# Altium PCB HANC_Digital.PcbDoc
Units mil, origin at the board's own origin, x right, y up, seen from the top; angles counter-clockwise.
Board outline 3140 x 2015 mil, 2 copper layers (Top Layer, Bottom Layer); 56 components, 112 nets, 257 pads, 57 vias.
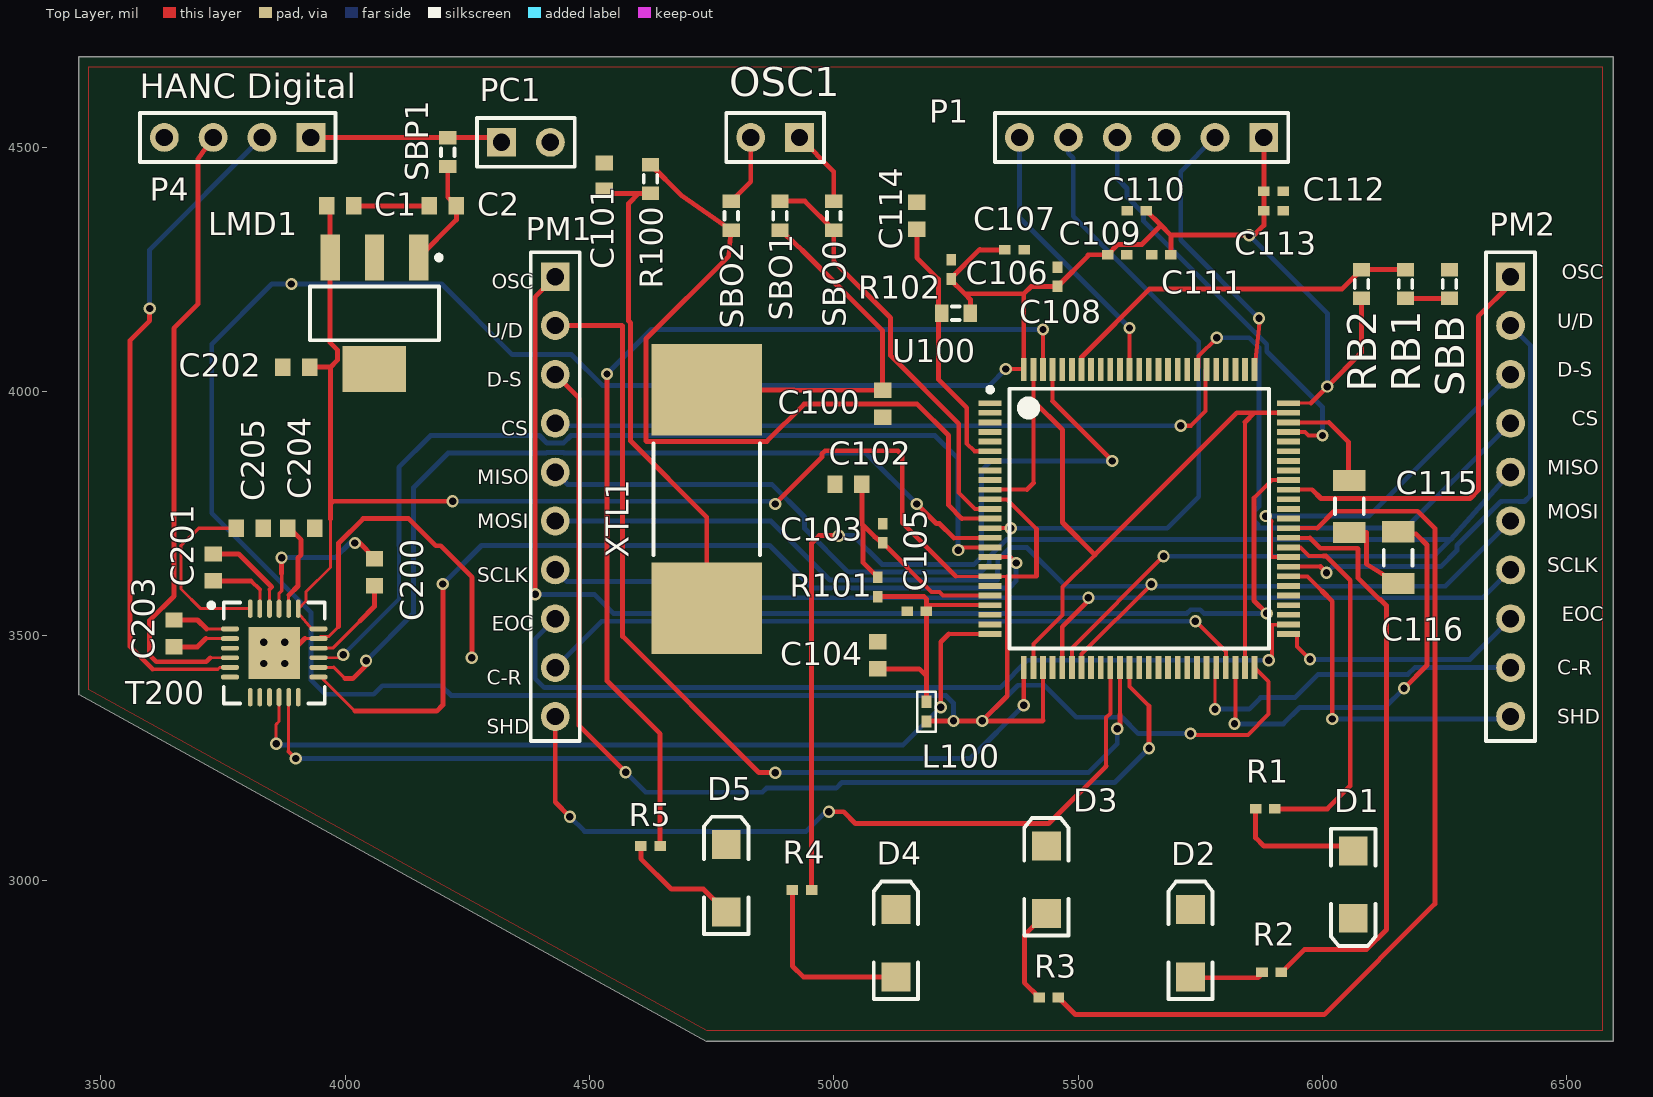
[diagram p0: Top Layer view]
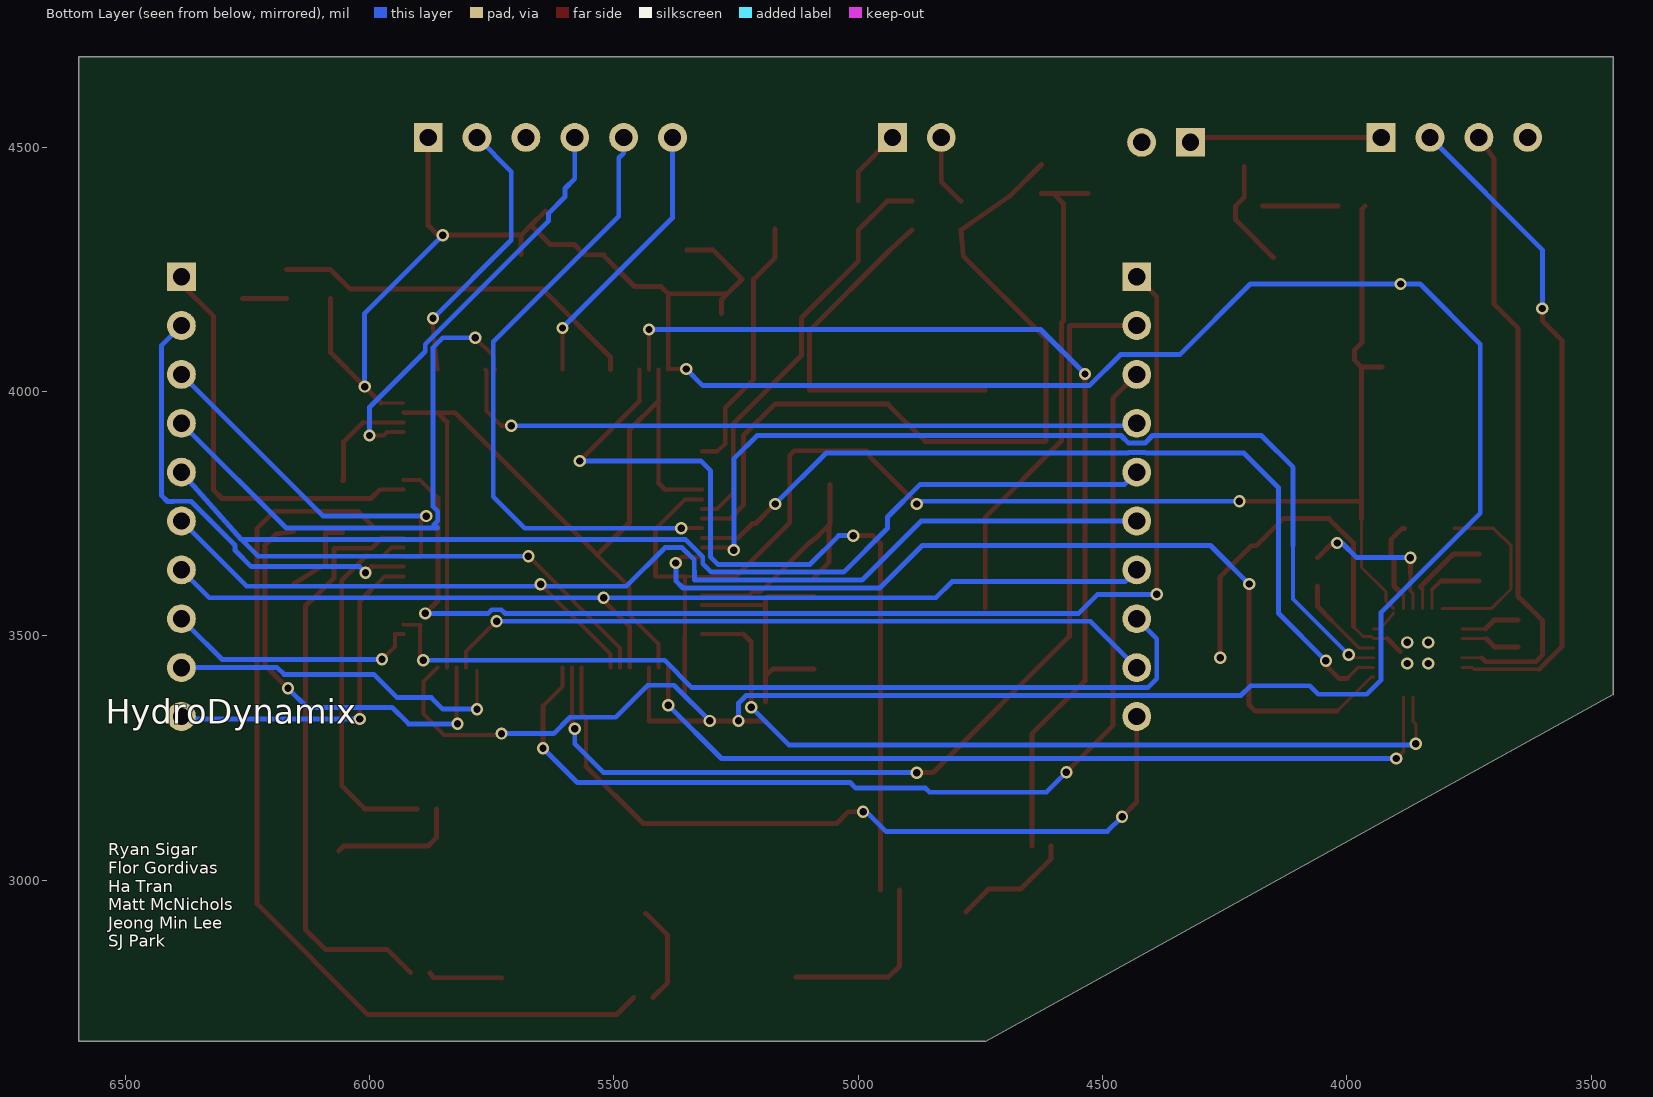
[diagram p1: Bottom Layer view, seen from below]

## Layer stack, top to bottom
Top Solder: solder mask 0.4, Solder Resist, Dk 3.5
Top Layer: signal copper 1.4
Dielectric 1: dielectric 12.6, FR-4, Dk 4.8
Bottom Layer: signal copper 1.4
Bottom Solder: solder mask 0.4, Solder Resist, Dk 3.5

## Board outline
6595,4685 6595,2670 4740,2670 3455,3380 3455,4685

## Design rules (kind name [scope] priority, off if disabled: settings)
Clearance [All] p1: gap=6
PolygonConnect [All] p1: connectstyle=Relief reliefconductorwidth=10 reliefentries=4 polygonreliefangle="90 Angle" airgapwidth=10
RoutingVias [All] p1: holewidth=15 width=25 viastyle="Through Hole" minholewidth=15 minwidth=25 maxholewidth=15 maxwidth=25
SMDNeckDown [All] p1: percent=70.000
SolderMaskExpansion [All] p1: expansion=4
Width [All] p1: maxlimit=10 minlimit=6 preferedwidth=10
30 further rules are at their usual default settings.

## Classes and differential pairs
component class HANC_Digital_TS: C1 C2 D1 D2 D3 D4 D5 LMD1 OSC1 P1 P4 PC1 PM1 PM2 R1 R2 R3 R4 R5 SBP1
component class U1: C100 C101 C102 C103 C104 C105 C106 C107 C108 C109 C110 C111 C112 C113 C114 C115 C116 L100 R100 R101 R102 RB1 RB2 SBB SBO0 SBO1 SBO2 U100 XTL1
component class U_RS-232: C200 C201 C202 C203 C204 C205 T200

## Components (designator, comment, footprint, x,y, rotation, side; value= is the part's Value field where it differs from the comment)
C1 "Cap" 1608[0603] 3990,4380 r180 top
C2 "Cap Semi" 1608[0603] 4200,4380 r0 top
C100 "Cap Semi" 1608[0603] 5100,3975 r270 top
C101 "Cap Semi" 1608[0603] 4530,4440 r90 top
C102 "Cap Pol3" 1608[0603] 5030,3810 r180 top
C103 "Cap Semi" 0402 5100,3710 r270 top
C104 "Cap Pol3" 1608[0603] 5090,3460 r90 top
C105 "Cap Semi" 0402 5170,3550 r180 top
C106 "Cap Semi" 0402 5240,4250 r270 top
C107 "Cap Semi" 0402 5370,4290 r180 top
C108 "Cap Semi" 0402 5457.76,4234.68 r270 top
C109 "Cap Semi" 0402 5580,4280 r180 top
C110 "Cap Semi" 0402 5620,4370 r0 top
C111 "Cap Semi" 0402 5670,4280 r0 top
C112 "Cap Semi" 0402 5900,4410 r180 top
C113 "Cap Semi" 0402 5900,4370 r180 top
C114 "Cap Semi" 1608[0603] 5170,4360 r270 top
C115 "Cap Semi" C1206 6055,3765 r90 top
C116 "Cap Semi" C1206 6155,3660 r90 top
C200 "Cap Semi" 1608[0603] 4060,3630 r270 top
C201 "Cap Semi" 1608[0603] 3730,3640 r270 top
C202 "Cap Semi" 1608[0603] 3900,4050 r180 top
C203 "Cap Semi" 1608[0603] 3650,3505 r270 top
C204 "Cap Semi" 1608[0603] 3910,3720 r0 top
C205 "Cap Semi" 1608[0603] 3805,3720 r0 top
D1 "LED2" 3.2X1.6X1.1 6063,2991 r270 top
D2 "LED2" 3.2X1.6X1.1 5730,2871.1 r90 top
D3 "LED2" 3.2X1.6X1.1 5435,3001.1 r90 top
D4 "LED2" 3.2X1.6X1.1 5127.17,2871.1 r90 top
D5 "LED2" 3.2X1.6X1.1 4780,3003.9 r90 top
L100 "Inductor" 0402C-GENERIC 5190,3325 r90 top
LMD1 "LM3940" SOT223_N 4060,4160 r270 top
OSC1 "Header 2" HDR1X2 4930,4520 r180 top
P1 "SWD" HDR1X6 5880,4520 r180 top
P4 "4AUX" HDR1X4 3930,4520 r180 top
PC1 "Header 2" HDR1X2 4320,4510 r0 top
PM1 "Header 10" HDR1X10 4430,4235 r270 top
PM2 "Header 10" HDR1X10 6385,4235 r270 top
R1 "Res3" 0402 5883,3146 r0 top
R2 "Res3" 0402 5896,2812 r0 top
R3 "Res3" 0402 5440,2760 r0 top
R4 "Res3" 0402 4935,2980 r0 top
R5 "Res3" 0402 4625,3070 r0 top
R100 "Res3" J1-0603 4625,4435 r90 top
R101 "Res3" 0402 5090,3600 r90 top
R102 "Res3" J1-0603 5250,4160 r0 top
RB1 "Res3" J1-0603 6170,4220 r270 top
RB2 "Res3" J1-0603 6080,4220 r90 top
SBB "Res3" J1-0603 6260,4220 r270 top
SBO0 "Res3" J1-0603 5000,4360 r90 top (schematic designator SB100)
SBO1 "Res3" J1-0603 4890,4360 r90 top (schematic designator SB101)
SBO2 "Res3" J1-0603 4790,4360 r90 top (schematic designator SB102)
SBP1 "Res3" J1-0603 4210,4490 r270 top (schematic designator SB_LMD1)
T200 "TRS3122" QFN50P485X485X100_HS-25N 3855,3465 r0 top
U100 "STM32F413VGT6" STM-LQFP100_V 5625,3740 r0 top
XTL1 "MA-505" CAPC15256X06N 4740,3780 r90 top

## Footprints (in the part's own frame and the unit in brackets; to place one, negate y for a bottom-side part, rotate by r counter-clockwise, add the part's x,y. Pads: shape width x height; smd on the part's side, far side on the other; paste and mask are expansions set on the pad)
3.2X1.6X1.1 [mm] "SMT LED; 2 Flat Leads"
  rect 1.5x1.5 smd: 1(-1.75,0) 2(1.75,0)
  silkscreen extent -2.9,-1.15 3.2,1.15
0402 [mm] "Chip Capacitor, Body 1.0x0.5mm, IPC High Density"
  rect 0.6x0.5 smd: 1(-0.5,0) 2(0.5,0)
  body extent -0.55,-0.3 0.55,0.3, height 1.3
0402C-GENERIC [mil]
  rect 25x20 smd: 1(0,0) 2(40,0)
  silkscreen extent -21,-19 61,19
1608[0603] [mm] "Chip Capacitor, Body 1.6x0.8mm, IPC High Density"
  rect 0.8x0.9 smd: 1(-0.7,0) 2(0.7,0)
  body extent -0.87,-0.48 0.87,0.48, height 1.3
C1206 [mm] "Chip Capacitor, Body 3.2x1.6mm, IPC High Density"
  rect 1.1x1.7 smd: 1(-1.35,0) 2(1.35,0)
  silkscreen extent -0.4,-0.75 0.4,0.75, body extent -1.7,-0.9 1.7,0.9, height 1.3
CAPC15256X06N [mm] "Chip Capacitor, 2-Leads, Body 15.20x5.60mm, IPC Medium Density"
  rect 4.75x5.75 smd: 1(-5.675,0) 2(5.675,0)
  silkscreen extent -2.9,-2.78 2.9,2.78, body extent -7.7,-2.85 7.7,2.85, height 0.6
HDR1X2 [mm] "Connector; Header; 2 Position"
  rect 1.5x1.5 hole 0.9: 1(0,0)
  round 1.5 hole 0.9: 2(2.54,0)
  silkscreen extent -1.27,-1.27 3.81,1.27
HDR1X4 [mm] "Connector; Header; 4 Position"
  rect 1.5x1.5 hole 0.9: 1(0,0)
  round 1.5 hole 0.9: 2(2.54,0) 3(5.08,0) 4(7.62,0)
  silkscreen extent -1.27,-1.27 8.89,1.27
HDR1X6 [mm] "Connector; Header; 6 Position"
  rect 1.5x1.5 hole 0.9: 1(0,0)
  round 1.5 hole 0.9: 2(2.54,0) 3(5.08,0) 4(7.62,0) 5(10.16,0) 6(12.7,0)
  silkscreen extent -1.27,-1.27 13.97,1.27
HDR1X10 [mm] "Connector; Header; 10 Position"
  rect 1.5x1.5 hole 0.9: 1(0,0)
  round 1.5 hole 0.9: 2(2.54,0) 3(5.08,0) 4(7.62,0) 5(10.16,0) 6(12.7,0) 7(15.24,0) 8(17.78,0) 9(20.32,0) 10(22.86,0)
  silkscreen extent -1.27,-1.27 24.13,1.27
J1-0603 [mm] "Chip Resistor, Body 1.6x0.8mm, IPC High Density"
  rect 0.7x0.9 smd: 1(-0.75,0) 2(0.75,0)
  silkscreen extent -0.2,-0.35 0.2,0.35, body extent -0.85,-0.48 0.85,0.48, height 0.9
QFN50P485X485X100_HS-25N [mm] "QFN, 24-Leads, Body 4.85x4.85mm, Pitch 0.50mm, Thermal Pad 2.70x2.70mm, IPC Medium Density"
  oval 0.95x0.25 smd: 1(-2.3,1.25) 2(-2.3,0.75) 3(-2.3,0.25) 4(-2.3,-0.25) 5(-2.3,-0.75) 6(-2.3,-1.25) 13(2.3,-1.25) 14(2.3,-0.75) 15(2.3,-0.25) 16(2.3,0.25) 17(2.3,0.75) 18(2.3,1.25)
  oval 0.25x0.95 smd: 7(-1.25,-2.3) 8(-0.75,-2.3) 9(-0.25,-2.3) 10(0.25,-2.3) 11(0.75,-2.3) 12(1.25,-2.3) 19(1.25,2.3) 20(0.75,2.3) 21(0.25,2.3) 22(-0.25,2.3) 23(-0.75,2.3) 24(-1.25,2.3)
  rect 2.7x2.7 smd: 25(0,0)
  silkscreen extent -3.4,-2.62 2.62,2.62, body extent -2.48,-2.47 2.47,2.48, height 1
SOT223_N [mm] "SOT223, 4-Leads, Body 6.5x3.5mm, Pitch 2.3mm, Lead Span 7mm, IPC Medium Density"
  rect 2.4x1 smd: 1(-2.9,2.3) 2(-2.9,0) 3(-2.9,-2.3)
  rect 2.4x3.3 smd: 4(2.9,0)
  silkscreen extent -3.02,-3.35 1.4,3.48, body extent -1.85,-3.35 1.85,3.35, height 1.7
STM-LQFP100_V [mm] "Thin QFP, 100-Leads, Body 14x14mm, Pitch 0.5mm, ST Recommended"
  rect 1.2x0.3 smd: 1(-7.75,6) 2(-7.75,5.5) 3(-7.75,5) 4(-7.75,4.5) 5(-7.75,4) 6(-7.75,3.5) 7(-7.75,3) 8(-7.75,2.5) 9(-7.75,2) 10(-7.75,1.5) 11(-7.75,1) 12(-7.75,0.5) 13(-7.75,0) 14(-7.75,-0.5) 15(-7.75,-1) 16(-7.75,-1.5) 17(-7.75,-2) 18(-7.75,-2.5) 19(-7.75,-3) 20(-7.75,-3.5) 21(-7.75,-4) 22(-7.75,-4.5) 23(-7.75,-5) 24(-7.75,-5.5) 25(-7.75,-6) 51(7.75,-6) 52(7.75,-5.5) 53(7.75,-5) 54(7.75,-4.5) 55(7.75,-4) 56(7.75,-3.5) 57(7.75,-3) 58(7.75,-2.5) 59(7.75,-2) 60(7.75,-1.5) 61(7.75,-1) 62(7.75,-0.5) 63(7.75,0) 64(7.75,0.5) 65(7.75,1) 66(7.75,1.5) 67(7.75,2) 68(7.75,2.5) 69(7.75,3) 70(7.75,3.5) 71(7.75,4) 72(7.75,4.5) 73(7.75,5) 74(7.75,5.5) 75(7.75,6)
  rect 0.3x1.2 smd: 26(-6,-7.75) 27(-5.5,-7.75) 28(-5,-7.75) 29(-4.5,-7.75) 30(-4,-7.75) 31(-3.5,-7.75) 32(-3,-7.75) 33(-2.5,-7.75) 34(-2,-7.75) 35(-1.5,-7.75) 36(-1,-7.75) 37(-0.5,-7.75) 38(0,-7.75) 39(0.5,-7.75) 40(1,-7.75) 41(1.5,-7.75) 42(2,-7.75) 43(2.5,-7.75) 44(3,-7.75) 45(3.5,-7.75) 46(4,-7.75) 47(4.5,-7.75) 48(5,-7.75) 49(5.5,-7.75) 50(6,-7.75) 76(6,7.75) 77(5.5,7.75) 78(5,7.75) 79(4.5,7.75) 80(4,7.75) 81(3.5,7.75) 82(3,7.75) 83(2.5,7.75) 84(2,7.75) 85(1.5,7.75) 86(1,7.75) 87(0.5,7.75) 88(0,7.75) 89(-0.5,7.75) 90(-1,7.75) 91(-1.5,7.75) 92(-2,7.75) 93(-2.5,7.75) 94(-3,7.75) 95(-3.5,7.75) 96(-4,7.75) 97(-4.5,7.75) 98(-5,7.75) 99(-5.5,7.75) 100(-6,7.75)
  silkscreen extent -7.87,-6.75 6.75,6.82, body extent -8,-8 8,8, height 1.6

## Part data
C1: library part "Cap Semi", "Capacitor (Semiconductor SIM Model)"
C2 C100 C101 C106 C107 C108 C109 C110 C111 C112 C113 C114 C115 C116 C200 C201 C202 C203 C204 C205: "Capacitor (Semiconductor SIM Model)"
C102 C104: "TACL105K016XTA"
C103 C105: "C1005X5R1E103K050BA"
D1 D2 D3 D4 D5: "Typical RED, GREEN, YELLOW, AMBER GaAs LED"
LMD1 T200: library part Component_1
OSC1 PC1: "Header, 2-Pin"
P1: library part "Header 6", "Header, 6-Pin"
P4: library part "Header 4", "Header, 4-Pin"
PM1 PM2: "Header, 10-Pin"
R1 R2 R3 R4 R5 R100 R102 RB1 RB2 SBB SBO1 SBP1: "Resistor"
R101: "RC0402FR-0747RL"
SBO0: "SB PH0"
SBO2: "SB_PH1"
U100: library part CMP-1771-00004-1, "ARM Cortex-M4 32-Bit DSP+FPU, 1024 KB Flash, 82 I/Os, 100-Pin LQFP, -40 to 85 degC, Tray"

## Via types
v1: diameter 25, hole 15, Top Layer to Bottom Layer, 57 vias

## Nets (pads, with @x,y where several pads share a name; then routed paths per layer and width w, separated by ;. In a path a pad name is that pad's centre, name@x,y a point inside that pad or via, vN(x,y) a via of type N, cw(c..) or ccw(c..) an arc to the next point about the centre after c; other vN are vias at no path point)
5V: P4.1 PC1.1 SBP1.1 | length 393.9
  Top Layer w10: P4.1 4074.53,4519.53 SBP1.1 4310.47,4519.53 PC1.1
BOOT0: RB1.1 RB2.2 U100.94 | length 762.7
  Top Layer w10: U100.94 5506.89,4070.52 5646.37,4210 6040.47,4210 RB2.2 RB1.1
D3V3: C1.2 C106.2 C107.2 C108.2 C109.2 C110.2 C111.2 C112.2 C113.2 C202.1 L100.1 LMD1.3 P1.1 R102.2 RB2.1 T200.18 T200.19 U100.11 U100.19 U100.28 U100.50 U100.75 U100.100 | length 10298.7
  Top Layer w6: T200.19@3904.21,3547 3932,3514.21 T200.18 ; T200.19 3920.22,3571.56 ; 3920.22,3570 3920.22,3571.56 ; 3970,3738.81 3970,3640 3920.22,3590.22 3920.22,3571.56 ; 5249.51,3621.89 U100.19 5354,3621.89 ; U100.75 5976.22,3976.22
  Top Layer w8.27: U100.11 5354,3779.37 5414.5,3718.87 ; v1(5352,4046) U100.100@5388.78,4046 ; 5355,3381 5354,3621.89 5413.73,3621.89 ; U100.100 U100.100@5388.78,4046 ; 5388.78,4200 U100.100@5388.78,4046 ; 5428.15,3327 U100.28 ; v1(5730,3300) 5732.63,3297.37 5847.37,3297.37 5890,3340 5890,3406.1 U100.50
  Top Layer w10: C202.1 3970,4050 ; C1.2 3969.45,4372.99 LMD1.3 3969.45,4100 3984.04,4085.41 3984.04,4064.04 3970,4050 ; 3970,3738.81 3970,3770 ; v1(4220,3775.53) 3975.53,3775.53 3970,3770 ; v1(4880,3770) 4975.69,3865.69 4975.69,3872.27 4982.14,3878.72 5131.28,3878.72 5140,3870 5140,3731.4 5249.51,3621.89 ; L100.1 5190,3326 v1(5245,3326) v1(5304,3326) ; R102.2 5279.53,4188.23 5267.76,4200 ; C107.2 5300,4290 5298.88,4291.12 5237.76,4230 5267.76,4200 ; 5355,3381 5355,3377 v1(5304,3326) ; 5413.73,3621.89 5414.5,3622.66 5414.5,3718.87 ; 5428.15,3327 5427.15,3326 v1(5304,3326) ; C110.2 5669.68,4340 ; C111.2 5689.68,4320 ; 5690.32,4320.63 5689.69,4320 ; P1.1 5880,4340 5860,4320 v1(5850,4320) 5689.69,4320 ; 5976.22,3976.22 v1(6010,4010) 6080,4080 RB2.1 ; 3970,3770 3970,4050 ; 5267.76,4200 5388.78,4200 5403.78,4215 C108.2 5521.38,4278.62 5520,4280 C109.2 5581.16,4300.84 5630.53,4300.84 5669.68,4340 ; 5669.68,4340 5689.68,4320
  Bottom Layer w10: v1(4220,3775.53) 4874.47,3775.53 v1(4880,3770) ; v1(5245,3326) 5245,3362.5 5229.5,3378 4217,3378 4197,3398 4076,3398 4058.5,3380.5 3959.5,3380.5 3930.5,3409.5 3930.5,3547.5 3727,3751 3727,4097 3850,4220 v1(3890,4220) 4197.69,4220 4342.16,4075.53 4463.24,4075.53 4526.27,4012.5 5317.5,4012.5 5318,4012 v1(5352,4046) ; v1(5304,3326) 5377,3399 5431,3399 5496.5,3333.5 5589.73,3333.5 5623.23,3300 v1(5730,3300) ; v1(5850,4320) 6010,4160 v1(6010,4010)
DGND: C1.1 C2.1 C100.2 C101.2 C102.2 C103.1 C104.2 C105.2 C106.1 C107.1 C108.1 C109.1 C110.1 C111.1 C112.1 C113.1 C114.1 C115.1 C116.1 C202.2 C204.2 C205.2 D1.2 D2.2 D3.2 D4.2 D5.2 LMD1.2 LMD1.4 P1.3 P4.4 PC1.2 SBB.1 T200.17 U100.10 U100.20 U100.27 U100.49 U100.74 U100.99 | length 3149.7
  Top Layer w6: 3917.76,3494.53 T200.17 3949.31,3498.29 3965.93,3498.29 3986.5,3518.86
  Top Layer w8.27: U100.10 5395.02,3799.06 ; U100.27 5408.46,3483 5468,3542.54 5468,3599.54 5534.23,3665.77 ; 5408.46,3812.5 5408.46,3981 U100.99 ; 5825,3956.54 5860.57,3956.54 U100.74 ; U100.49 5841.54,3937.5
  Top Layer w10: 3891.62,3468.38 3917.76,3494.53 ; 3986.5,3518.86 3986.5,3689.73 4036.77,3740 4130,3740 4185.69,3684.31 4195.69,3684.31 4260,3620 v1@4260,3455 ; C1.1 C2.1 ; 5395.02,3799.06 5408.46,3812.5 ; 5408.46,3981 5468,3921.46 5468,3732 5534.23,3665.77 5825,3956.54 ; 5841.54,3937.5 5860.57,3956.54 ; C115.1 6089.78,3711.85 6089.78,3647.07 C116.1
  other v1: 4259,3455
NetC2_2: C2.2 LMD1.1 SBP1.2 | length 225.5
  Top Layer w10: LMD1.1 4227.56,4351.18 C2.2 4210,4397.56 SBP1.2
NetC100_1: C100.1 SBO1.1 XTL1.2 | length 776.6
  Top Layer w10: XTL1.2 4919,4003.42 4919.86,4002.56 C100.1 5100,4124.67 4935,4289.67 SBO1.1
NetC101_1: C101.1 R100.1 XTL1.1 | length 1018.9
  Top Layer w10: C101.1@4530,4405.47 4601,4405.47 ; R100.1 4601,4405.47 ; XTL1.1 4740,3742.92 4584,3898.92 4584,4140.63 4580,4144.63 4580,4384.47 4601,4405.47
NetC102_1: C102.1 C103.2 R101.2 U100.21 | length 522.4
  Top Layer w8.27: 5150.31,3640 5200.15,3590.17 5216,3590.17 5223.64,3582.52 U100.21
  Top Layer w10: C102.1 5057.56,3728.07 5060,3725.63 ; R101.2 5060,3649.69 5060,3725.63 ; 5150.31,3640 C103.2 5083,3703.63 5060.5,3726.13 5060,3725.63
NetC104_1: C104.1 C105.1 L100.2 R101.1 U100.22 | length 548.7
  Top Layer w8.27: 5190.5,3562.83 U100.22
  Top Layer w10: C104.1 5175,3432.44 5190,3417.44 ; R101.1 5185,3580.32 5190,3575.32 5190,3563.33 ; L100.2 5190,3417.44 ; 5190.5,3562.83 5190,3563.33 ; 5190,3417.44 5190,3563.33
NetC114_2: C114.2 R102.1 U100.6 | length 535.7
  Top Layer w8.27: 5272,3893.3 5287.5,3877.8 U100.6
  Top Layer w10: C114.2 5170,4274 5214,4230 5214,4024.72 5272,3966.72 5272,3893.3
NetC115_2: C115.2 U100.73 | length 220.2
  Top Layer w8.27: U100.73 6013.15,3936.85
  Top Layer w10: 6013.15,3936.85 6053,3897 6053,3818.15 C115.2
NetC116_2: C116.2 U100.48 | length 873.9
  Top Layer w8.27: v1(5820,3320) 5821.85,3321.85 U100.48
  Top Layer w10: C116.2 6191.85,3708.15 6214,3686 6214,3440 v1(6167,3393)
  Bottom Layer w10: v1(5820,3320) 5920,3320 5953.5,3353.5 6127.5,3353.5 v1(6167,3393)
NetC200_1: C200.1 T200.21 | length 321.4
  Top Layer w6: T200.21 3864.84,3587.34
  Top Layer w6.89: 3864.84,3587.34 3870,3592.5 3870,3627.5
  Top Layer w10: 3870,3627.5 v1(3870,3660) ; v1(4020,3690) 4030,3690 C200.1@4060,3660
  Bottom Layer w10: v1(3870,3660) 3980,3660 4010,3690 v1(4020,3690)
NetC200_2: C200.2 T200.16 | length 192.2
  Top Layer w6: T200.16 3974.84,3474.84 4030,3530
  Top Layer w10: 4030,3530 4060,3560 C200.2
NetC201_1: C201.1 T200.22 | length 194.4
  Top Layer w6: T200.22 3845.16,3595.21
  Top Layer w8: 3845.16,3595.21 3849.95,3600
  Top Layer w10: C201.1 3782.44,3667.56 3849.95,3600.05 3849.95,3600
NetC201_2: C201.2 T200.23 | length 141.9
  Top Layer w6: T200.23 3825.47,3594.53
  Top Layer w8: 3807.56,3612.44 3825.47,3594.53
  Top Layer w10: C201.2 3807.56,3612.44
NetC203_1: C203.1 T200.1 | length 122
  Top Layer w6: 3716.35,3514.21 T200.1
  Top Layer w10: C203.1 3698,3532.56 3716.35,3514.21
NetC203_2: C203.2 T200.2 | length 121.5
  Top Layer w6: 3715.09,3494.53 T200.2
  Top Layer w10: C203.2 3698,3477.44 3715.09,3494.53
NetC204_1: C204.1 T200.20 | length 188.8
  Top Layer w6: T200.20 3884.53,3583
  Top Layer w6.89: 3884.53,3583 3885.53,3584
  Top Layer w10: C204.1 3886.46,3720 3910,3696.46 3910,3665.98 3903.5,3659.48 3903.5,3601.97 3885.53,3584
NetC205_1: C205.1 T200.24 | length 377.5
  Top Layer w6: 3664,3684 3664,3596 3704.45,3555.55 T200.24
  Top Layer w6.89: 3664,3684 3700,3720 C205.1 C205.1@3780,3720
NetD1_1: D1.1 R1.1 | length 270.1
  Top Layer w10: R1.1 5863.32,3086.68 5880,3070 6052.9,3070 D1.1
NetD2_1: D2.1 R2.1 | length 150.9
  Top Layer w10: D2.1@5730,2800 5730.3,2800.3 5868.15,2800.3 R2.1@5876.46,2809.77
NetD3_1: D3.1 R3.1 | length 203.4
  Top Layer w10: R3.1 5390,2790.32 5390,2887.2 D3.1
NetD4_1: D4.1 R4.1 | length 376.7
  Top Layer w10: R4.1 4915.32,2824.39 4937.5,2802.2 D4.1
NetD5_1: D5.1 R5.1 | length 245.8
  Top Layer w10: R5.1 4605.32,3044 4667.32,2982 4733,2982 D5.1
NetR100_2: R100.2 SBO2.1 U100.13 | length 1631.9
  Top Layer w8.27: 5262.22,3740 U100.13
  Top Layer w10: R100.2 4687.99,4401.53 SBO2.1 4785,4277.19 4615.81,4108 4615.81,3899 4616.81,3898 4863,3898 4939.19,3974.19 5170.81,3974.19 5234.89,3910.11 5234.89,3767.32 5262.22,3740
NetRB1_2: RB1.2 SBB.2 | length 90
  Top Layer w10: RB1.2 SBB.2
NetSBO0_1: SBO0.1 SBO1.2 U100.12 | length 855.8
  Top Layer w8.27: 5255.72,3793 5289.03,3759.69 U100.12
  Top Layer w10: SBO1.2 4940.94,4389.53 SBO0.1 5000,4267 5116,4151 5116,4073.84 5255.72,3934.12 5255.72,3793
NRST: P1.5 U100.14 | length 1299.3
  Top Layer w8.27: U100.14 v1(5362.18,3720.32)
  Bottom Layer w10: v1(5362.18,3720.32) 5682.32,3720.32 5746.76,3784.76 5746.76,4102 5490,4358.76 5490,4477.92 5480,4487.92 P1.5
PA0: U100.23
PA1: U100.24
PA2_USART2_TX: T200.10 U100.25 | length 1731.9
  Top Layer w6: v1(3859,3279) 3859,3319 3864.84,3324.84 T200.10
  Top Layer w8.27: 5235.28,3503.78 U100.25
  Top Layer w10: v1(5219,3354) 5219,3487.5 5235.28,3503.78
  Bottom Layer w10: v1@3864.84,3279.84 3862,3277 5142,3277 v1(5219,3354)
PA3_USART2_RX: T200.11 U100.26 | length 1743.3
  Top Layer w6: 3884.53,3263.47 T200.11
  Top Layer w8: 3884.53,3263.47 v1(3899,3249)
  Top Layer w8.27: v1(5388.78,3358) U100.26
  Bottom Layer w10: v1(3899,3249) 5279.78,3249 v1(5388.78,3358)
PA4: U100.29
PA5_SCLK: PM1.7 PM2.7 U100.30 | length 2167.3
  Top Layer w8.27: U100.30 5467.52,3518.52
  Top Layer w10: 5467.52,3518.52 5521,3572 v1(5521,3578)
  Bottom Layer w10: PM1.7 4454,3611 4808,3611 4841,3578 v1(5521,3578) ; v1@5521,3572 v1(5521,3578) ; PM2.7@6385,3620 6370,3620 6328,3578 v1(5521,3578)
PA6_MISO: PM1.5 PM2.5 U100.31 | length 3057.6
  Top Layer w8.27: U100.31 5487.2,3475.2 v1(5675,3663)
  Bottom Layer w10: PM1.5 4455,3810 4873.23,3810 4940,3743.23 4940,3720 5029.62,3630.38 5300.53,3630.38 5318.06,3647.91 5318.06,3661.68 5353.2,3696.82 6261.82,3696.82 ; v1(5675,3663) 6228,3663 6261.82,3696.82 ; PM2.5 6261.82,3696.82
PA7_MOSI: PM1.6 PM2.6 U100.32 | length 2367.8
  Top Layer w8.27: U100.32 5506.89,3462.5 v1(5649.96,3605.57)
  Bottom Layer w10: PM1.6 4871.38,3735 4992,3614.38 5334.88,3614.38 5335.5,3655.5 5360.82,3680.82 5395.18,3680.82 5474.5,3601.5 v1@5649.96,3601.5 ; v1(5649.96,3605.57) v1@5655.93,3605.57 ; v1@5655.93,3601.5 6251.5,3601.5 6370,3720 PM2.6@6385,3720
PA8_MCO1: PM1.1 U100.67 | length 2518.3
  Top Layer w8.27: 5860,3781.74 5897,3818.74 U100.67
  Top Layer w10: v1(4389,3585) 4389,4194 PM1.1 ; 5860,3781.74 5860,3572 v1(5886,3546)
  Bottom Layer w10: v1(4389,3585) 4510,3585 4549,3546 5722.77,3546 5730.27,3553.5 5749.73,3553.5 5757.23,3546 v1(5886,3546)
PA9: U100.68
PA10: U100.69
PA11: U100.70
PA12: U100.71
PA13_SWDIO: P1.4 U100.72 | length 893.7
  Top Layer w8.27: U100.72 5964,3917.17 5971.17,3910 v1(6000,3910)
  Bottom Layer w10: v1(6000,3910) 6000,3968 5886,4082 5886,4096.85 5633.6,4349.25 5633.6,4364.64 5600,4398.23 5600,4415.47 5580,4435.47 P1.4 ; P1.4 P1.4@5583.26,4526.12 ; P1.4 5580,4525.24 P1.4@5583.26,4526.12 ; P1.4@5583.26,4526.12 5586.88,4532.92 5590.58,4528.1 P1.4@5583.26,4526.12
PA14_SWCLK: P1.2 U100.76 | length 584.6
  Top Layer w8.27: U100.76 v1@5872.05,4149.79
  Top Layer w10: P1.2@5770,4510 P1.2
  Bottom Layer w10: P1.2 5710,4450 5710,4310 v1(5870,4150)
PA15: U100.77
PB0_SHDN1: PM1.10 U100.35 | length 1601.2
  Top Layer w8.27: 5557.37,3233.37 5557.37,3332.51 5565.94,3341.09 U100.35
  Top Layer w10: PM1.10 4430,3160 v1(4460,3130) ; v1(4990,3140) 5020,3140 5044,3116 5440,3116 5557.37,3233.37
  Bottom Layer w10: v1(4460,3130) 4490,3100 4943.77,3100 v1@4983.77,3140
PB1_UP-DWN1: PM1.2 U100.36 | length 2083.6
  Top Layer w8.27: 5585.63,3339.37 U100.36
  Top Layer w10: PM1.2 4567,4135 4568,4134 4568,3499 4847,3220 v1(4880,3220) ; v1(5580,3310) 5585.63,3315.63 5585.63,3339.37
  Bottom Layer w10: v1(4880,3220) 5521,3220 5580,3279 v1(5580,3310)
PB2_DACSTEP1: PM1.3 U100.37 | length 2180.2
  Top Layer w8.27: U100.37 5605.32,3396 5645,3356.32
  Top Layer w10: PM1.3 4479,3986 4479,3316 v1(4574,3221) ; v1(5645,3270) 5645,3356.32
  Bottom Layer w10: v1(4574,3221) 4615,3180 4853.77,3180 4862.27,3188.5 5004.73,3188.5 5016.23,3200 5575,3200 v1(5645,3270)
PB3_SWO: P1.6 U100.89 | length 568.2
  Top Layer w8.27: U100.89 v1(5605.32,4130)
  Bottom Layer w10: P1.6 5380,4355.32 v1(5605.32,4130)
PB4: U100.90
PB5: U100.91
PB6: U100.92
PB7: U100.93
PB8: U100.95
PB9: U100.96
PB10_CONVRUN1: PM1.9 U100.47 | length 1470.3
  Top Layer w8.27: v1(5740,3530) 5740.18,3530 5802.17,3468.01 U100.47
  Bottom Layer w10: PM1.9 4525,3530 v1(5740,3530)
PB12_EOC2: PM2.8 U100.51 | length 519.3
  Top Layer w8.27: U100.51 5948,3503.78 5948,3478.5 v1(5974.5,3452)
  Bottom Layer w10: v1(5974.5,3452) 6302,3452 6370,3520 PM2.8@6385,3520
PB13_EOC1: PM1.8 U100.52 | length 1780.7
  Top Layer w8.27: v1(5890,3450) 5896.36,3456.36 5896.36,3522.1 5896,3522.46 U100.52
  Bottom Layer w10: PM1.8 4389,3494 4389,3412.5 4407.5,3394 5340.28,3394 5396.28,3450 v1(5890,3450)
PB14: U100.53
PB15: U100.54
PC0_FORCEON: T200.14 U100.15 | length 1810.1
  Top Layer w6: T200.14 3977.09,3435.47
  Top Layer w6.89: 3977.09,3435.47 4000.06,3412.5
  Top Layer w8.27: 5245.55,3700.63 U100.15
  Top Layer w10: 4000.06,3412.5 4015.4,3412.5 4043,3440.1 v1(4043,3449) ; v1(5170,3770) 5210,3730 5216.18,3730 5245.55,3700.63
  Bottom Layer w10: v1(4043,3449) 4140,3546 4140,3803.5 4210.5,3874 4411.69,3874 4413.21,3875.53 4446.79,3875.53 4448.31,3874 5066,3874 v1(5170,3770) v1@5176,3770
PC1_FORCEOFF: T200.15 U100.16 | length 1942.6
  Top Layer w6: T200.15 v1@3989.84,3455.16
  Top Layer w8.27: v1@5259.94,3680.94 U100.16
  Top Layer w10: v1@3989.84,3455.16 3990.05,3455.16 v1(3996.35,3461.46) ; v1(5254.5,3675.5) v1@5259.94,3680.94
  Bottom Layer w8: v1(3996.35,3461.46) 4110,3575.11 4110,3685
  Bottom Layer w10: 4110,3685 4110,3845 4175,3910 4397.69,3910 4413.21,3894.47 4446.79,3894.47 4462.31,3910 5207,3910 5254.5,3862.5 v1(5254.5,3675.5)
PC2_INVALID: T200.13 U100.17 | length 1879.2
  Top Layer w6: T200.13 3950,3415.79 4019.79,3346
  Top Layer w8.27: U100.17 5361.24,3661.26 v1(5373.23,3649.27)
  Top Layer w10: 4019.79,3346 4187.5,3346 4200,3358.5 v1(4200,3606)
  Bottom Layer w10: v1(4200,3606) 4279,3685 4869,3685 4956.15,3597.85 5358.58,3597.85 5373.23,3612.5 v1(5373.23,3649.27)
PC3: U100.18
PC4: U100.33
PC5: U100.34
PC6: U100.63
PC7: U100.64
PC8: U100.65
PC9_MCO2: PM2.1 U100.66 | length 852.7
  Top Layer w8.27: U100.66 5979,3799.06
  Top Layer w10: 5979,3799.06 5997.06,3781 6302,3781 6319,3798 6319,4154 PM2.1@6385,4220
PC10: U100.78
PC11: U100.79
PC12: U100.80
PC13: U100.7
PC14: U100.8
PC15: U100.9
PD0_CS1: PM1.4 U100.81 | length 1431.4
  Top Layer w8.27: v1(5710,3930) 5731.02,3930 5761.02,3960 5761.02,4043.35 U100.81
  Bottom Layer w10: PM1.4 4435,3930 v1(5710,3930)
PD1_CS2: PM2.4 U100.82 | length 1161.6
  Top Layer w8.27: U100.82 5746.76,4048.76 5746.76,4072.94 v1(5783.82,4110)
  Bottom Layer w10: v1(5783.82,4110) 5850.22,4110 5870,4090.22 5870,3764.23 5860.5,3754.73 5860.5,3735.27 5867.88,3727.88 5861,3721 6171,3721 6370,3920 PM2.4@6385,3920
PD2: U100.83
PD3: U100.84
PD4: U100.85
PD5: U100.86
PD6: U100.87
PD7: U100.88
PD8: U100.55
PD9: U100.56
PD10_SHDN2: PM2.10 U100.57 | length 721
  Top Layer w8.27: U100.57 5969,3621.89 5999,3591.89
  Top Layer w10: 5999,3591.89 6020,3570.89 v1(6020,3330)
  Bottom Layer w10: v1(6020,3330) 6375,3330 PM2.10@6385,3320
PD11_UP-DWN2: PM2.2 U100.58 | length 931.5
  Top Layer w8.27: U100.58 5995.93,3641.57
  Top Layer w10: 5995.93,3641.57 v1(6008.43,3629.07)
  Bottom Layer w10: v1(6008.43,3629.07) 6020.93,3641.57 6242.07,3641.57 6275.43,3674.93 6275.43,3685.43 6365,3775 6367.69,3775 6368.21,3775.53 6401.79,3775.53 6402.31,3775 6413.5,3775 6426,3787.5 6426,4094 6400,4120 PM2.2@6385,4120
PD12_DACSTEP2: PM2.3 U100.59 | length 737.7
  Top Layer w8.27: 5895,3734 5895,3662.26 5896,3661.26 U100.59
  Top Layer w10: v1(5884,3745) 5895,3734
  Bottom Layer w10: v1(5884,3745) 6095,3745 6370,4020 PM2.3@6385,4020
PD13_LED1: R1.2 U100.60 | length 749.2
  Top Layer w8.27: U100.60 5955,3680.94 5972.75,3663.19 6001.81,3663.19
  Top Layer w10: R1.2 6010,3146 6057,3193 6057,3613.73 6007.54,3663.19 6001.81,3663.19
PD14_LED2: R2.2 U100.61 | length 1207.9
  Top Layer w8.27: U100.61 5974.37,3700.63
  Top Layer w10: R2.2@5916,2811 5963,2858 6090,2858 6131,2899 6131,3562 6118.8,3574.2 6116.98,3574.2 6073,3618.18 6073,3678.19 6072,3679.19 5995.81,3679.19 5974.37,3700.63
PD15_LED3: R3.2 U100.62 | length 1975.8
  Top Layer w8.27: U100.62 5989,3720.32
  Top Layer w10: R3.2 5494.69,2725 6003.37,2725 6230,2951.63 6230,3720 6195,3755 6023.68,3755 5989,3720.32
PE0_LED4: R4.2 U100.97 | length 1784.5
  Top Layer w8.27: 5447.83,3980.17 U100.97
  Top Layer w10: R4.2 4954.69,3689.69 4970,3705 v1(5010,3705) ; 5447.83,3980.17 v1(5570,3858)
  Bottom Layer w10: v1(5010,3705) 5040,3705 5098.62,3646.38 5287.5,3646.38 5302,3660.88 5302,3837.5 5322.5,3858 v1(5570,3858)
PE1_LED5: R5.2 U100.98 | length 2022.7
  Top Layer w8.27: U100.98 v1(5428.15,4127)
  Top Layer w10: v1(4536,4036) 4536,3408 4644.69,3299.31 R5.2
  Bottom Layer w10: v1(4536,4036) 4627,4127 v1(5428.15,4127)
PE2: U100.1
PE3: U100.2
PE4: U100.3
PE5: U100.4
PE6: U100.5
PE7: U100.38
PE8: U100.39
PE9: U100.40
PE10: U100.41
PE11: U100.42
PE12: U100.43
PE13: U100.44
PE14: U100.45
PE15_CONVRUN2: PM2.9 U100.46 | length 726.4
  Top Layer w6: v1(5780,3350) U100.46@5780,3430
  Bottom Layer w10: v1(5780,3350) 5850,3350 5873.5,3373.5 5943.5,3373.5 5991.05,3421.05 6174.95,3421.05 6188.91,3435 6370,3435 PM2.9@6385,3420
PH0-OSC_IN: OSC1.1 SBO0.2 | length 159.5
  Top Layer w10: OSC1.1 5000,4450 SBO0.2
PH1-OSC_OUT: OSC1.2 SBO2.2 | length 147
  Top Layer w10: SBO2.2 4830,4429.53 OSC1.2
RS232_IN: P4.3 T200.4 | length 1284
  Top Layer w6: 3724,3455.16 T200.4
  Top Layer w10: 3724,3455.16 3715.84,3447 3613.63,3447 3600,3460.63 3600,3531.58 3650,3581.58 3650,3677.57 3649.56,3678.02 3649.56,4129.56 3698.82,4178.82 3698.82,4475.61 P4.3
RS232_OUT: P4.2 T200.5 | length 1378.8
  Top Layer w6: 3740,3432 3743.47,3435.47 T200.5
  Top Layer w6.89: 3606,3432 3740,3432
  Top Layer w10: v1(3600,4170) 3600,4145 3560,4105 3560,3478 3606,3432
  Bottom Layer w10: v1(3600,4170) 3600,4290 P4.2
pads on no net: T200.3 T200.6 T200.7 T200.8 T200.9 T200.12 T200.25
copper on no net:
  other v1: 3833.35,3443.35 3876.65,3443.35 3833.35,3486.65 3876.65,3486.65

## Polygon pours and split planes (outlines as drawn)
DGND on Top Layer "DGND" (solid, shelved, pour order 0): 6500,2692.07 6492.07,2692.07 4740,2692.07 4200,2990 3475,3390 3475,4665 6572.93,4665 6572.93,4550 6572.93,2692.07

## Silkscreen, mask and mechanical layers (free items; w line width, h text height)
Top Overlay:
  text "HANC Digital" at 3580,4600 h50
  text "OSC" at 6490,4230 h30
  text "OSC" at 4300,4210 h30
  text "U/D" at 6480,4130 h30
  text "U/D" at 4290,4110 h30
  text "D-S" at 6480,4030 h30
  text "D-S" at 4290,4010 h30
  text "CS" at 6510,3930 h30
  text "CS" at 4320,3910 h30
  text "MISO" at 6460,3830 h30
  text "MISO" at 4270,3810 h30
  text "MOSI" at 6460,3740 h30
  text "MOSI" at 4270,3720 h30
  text "SCLK" at 6460,3630 h30
  text "SCLK" at 4270,3610 h30
  text "EOC" at 6490,3530 h30
  text "EOC" at 4300,3510 h30
  text "C-R" at 6480,3420 h30
  text "C-R" at 4290,3400 h30
  text "SHD" at 6480,3320 h30
  text "SHD" at 4290,3300 h30
Bottom Overlay:
  text "HydroDynamix" at 6540,3320 h50
  text "Ryan Sigar / Flor Gordivas / Ha Tran / Matt McNichols / Jeong Min Lee / SJ Park" at 6535,2863.34 h25